# Altium PCB PC110-itx.PcbDoc (part 13 of 16)
Units mm, origin at the board's own origin, x right, y up, seen from the top; angles counter-clockwise.
Board outline 170 x 170 mm, 16 copper layers (FC1, FC2, FC3, FC4, IP1, IC1, IC2, IP2, IP3, IC3, IC4, IP4, BC4, BC3, BC2, BC1), stack 3.903 mm thick; 935 components, 1357 nets, 4698 pads, 3240 vias.
Unrouted connection lines stored in the file: 552.
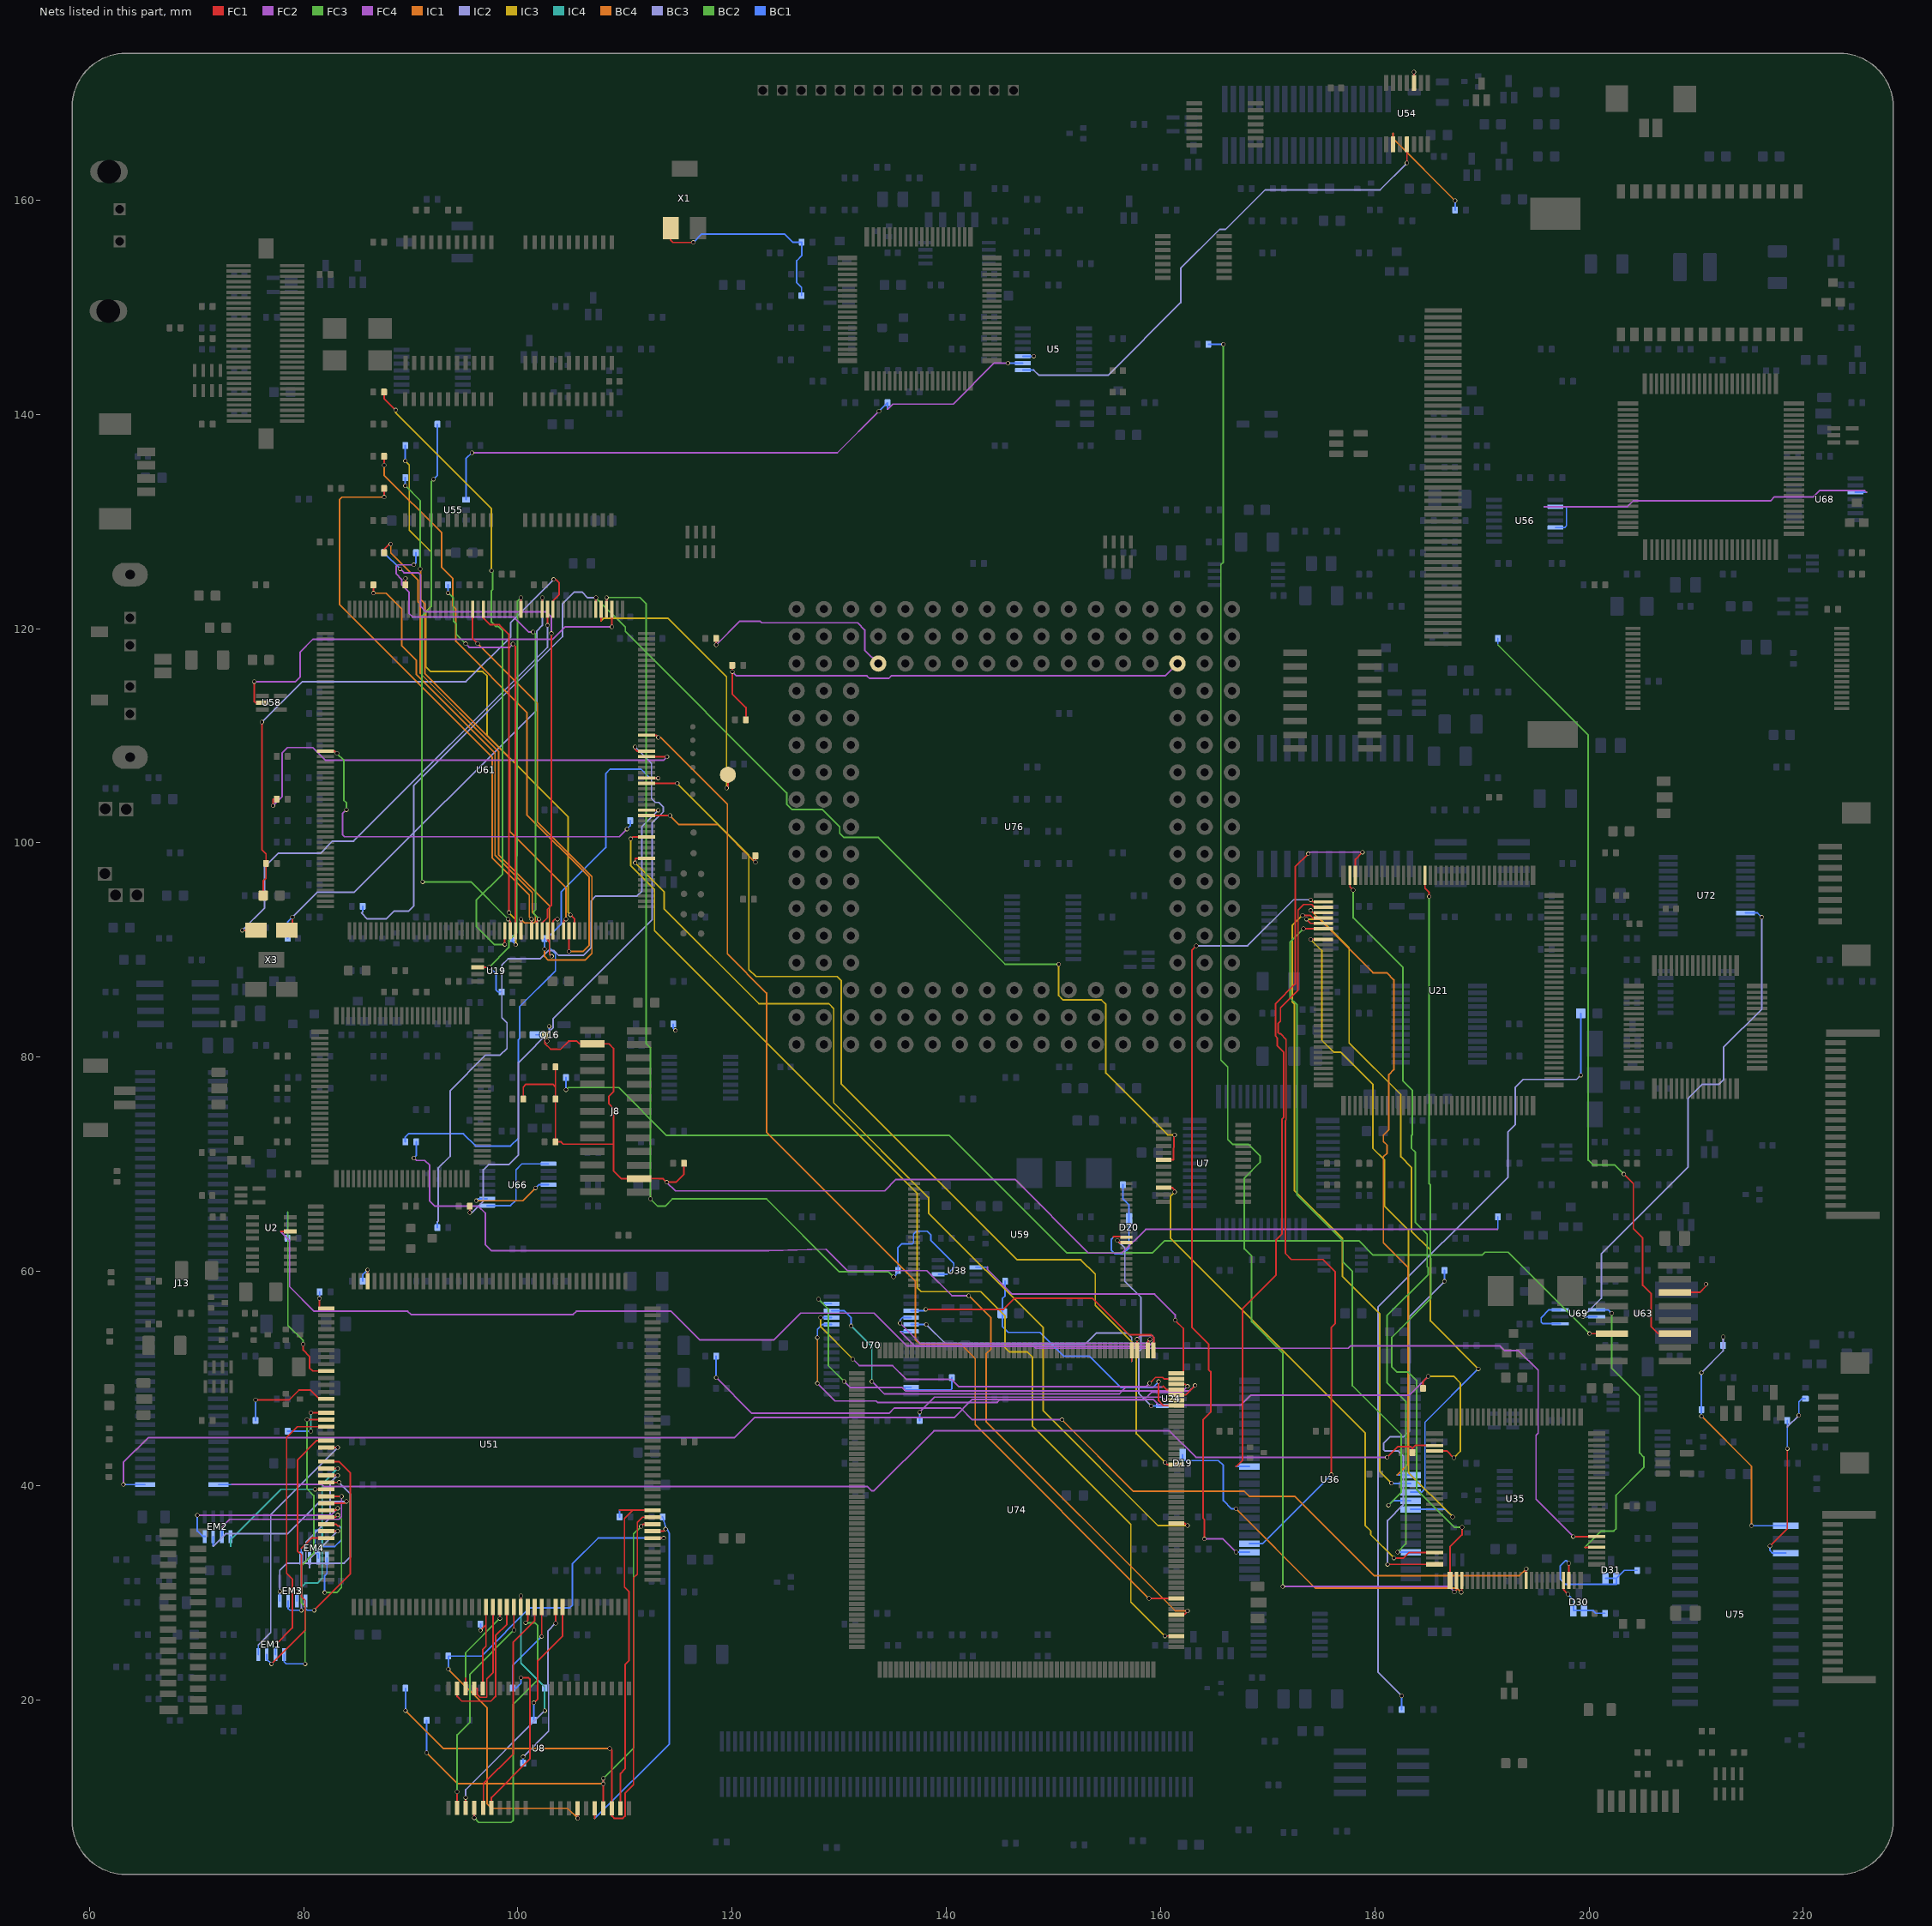
[diagram p26: the nets of this part, all layers, seen from the top]

## Via types
v1: diameter 0.4, hole 0.3, FC1 to BC1, 3240 vias

## Nets (pads, with @x,y where several pads share a name; then routed paths per layer and width w, separated by ;. In a path a pad name is that pad's centre, name@x,y a point inside that pad or via, vN(x,y) a via of type N, cw(c..) or ccw(c..) an arc to the next point about the centre after c; other vN are vias at no path point) (continued)
Net-(U51-IO11): R18.1 U8.34 U51.127 | length 53.2
  FC1 w0.15: v1(105.581,8.941) U8.34@105.581,9.871 ; U51.127@112.57,35.105 113.612,35.105 v1(113.614,35.103)
  IC1 w0.15: v1(93.51,22.86) 97.13,19.24 97.13,10.287 97.536,9.881 104.641,9.881 v1(105.581,8.941)
  BC1 w0.15: v1(93.51,22.86) R18.1@93.51,24.09 96.607,24.09 101.117,28.6 104.851,28.6 105.08,28.829 105.08,32.69 107.493,35.103 v1(113.614,35.103)
Net-(U51-IO12): R15.1 U8.36 U51.128 | length 33.5
  FC1 w0.15: 107.181,8.948 U8.36@107.181,9.871 ; U51.128@112.57,35.755 113.606,35.755 v1(113.792,35.941)
  BC1 w0.15: 107.181,8.948 107.188,8.941 114.148,15.9 114.148,35.535 113.89,35.996 v1(113.792,35.941) 113.792,36.172 R15.1@113.51,37.09
Net-(U51-IO13): R22.2 U8.37 U51.129 | length 49.7
  FC1 w0.15: v1(107.975,12.167) v1@107.981,12.161 ; U8.37@107.981,9.871 v1@107.981,12.161 ; v1(107.981,12.675) 107.981,12.167 v1@107.981,12.161 ; v1(111.506,36.195) 111.716,36.405 U51.129@112.57,36.405
  FC3 w0.15: v1(107.981,12.675) 110.795,15.488 110.795,35.484 v1(111.506,36.195)
  BC4 w0.15: v1(91.49,15.062) 94.386,12.167 v1(107.975,12.167)
  BC1 w0.15: v1(91.49,15.062) R22.2@91.49,18.09
Net-(U51-IO14): R233.1 U8.38 U51.130 | length 59.9
  FC1 w0.15: v1(108.578,15.469) 108.781,15.265 U8.38@108.781,9.871 108.781,9.144 108.984,8.941 109.804,8.941 110.007,9.144 110.007,11.278 110.795,12.065 110.795,31.394 111.15,31.75 111.15,36.576 111.629,37.055 U51.130@112.57,37.055
  BC4 w0.15: v1(89.51,18.999) 93.041,15.469 v1(108.578,15.469)
  BC1 w0.15: v1(89.51,18.999) R233.1@89.51,21.09
Net-(U51-IO15): R19.2 U8.39 U51.131 | length 32.4
  FC1 w0.15: 109.501,37.705 110.73,37.705 ; U8.39@109.581,9.871 109.581,13.137 110.007,13.564 110.007,23.292 110.388,23.673 110.388,30.099 109.952,30.536 109.952,36.927 110.73,37.705 ; U51.131@112.57,37.705 110.73,37.705
  BC1 w0.15: R19.2@109.49,37.09 109.49,37.694 109.501,37.705
Net-(U51-LP): R17.1 U51.54 | length 9.3
  FC1 w0.15: v1(75.51,48.006) 78.638,48.006 79.553,48.92 80.645,48.92 81.46,48.105 U51.54@82.13,48.105
  BC1 w0.15: R17.1@75.51,46.09 v1(75.51,48.006)
Net-(U51-OEL#): R263.1 U51.38 | length 2.3
  FC1 w0.15: U51.38@85.975,59.1 v1(85.975,60.147)
  BC1 w0.15: R263.1@85.51,59.09 85.51,59.682 v1(85.975,60.147)
Net-(U51-P0): EM1.5 U51.57 | length 28.2
  FC1 w0.15: v1(80.315,46.155) U51.57@82.13,46.155
  FC3 w0.15: v1(80.137,23.368) 80.137,28.727 79.807,29.058 79.807,32.537 80.95,33.68 80.95,39.065 80.315,39.7 v1(80.315,46.155)
  BC1 w0.15: EM1.5@78.175,24.24 78.175,23.571 78.378,23.368 v1(80.137,23.368)
Net-(U51-P1): EM1.6 U51.58 | length 25.3
  FC1 w0.15: v1(77.375,25.146) 78.943,26.714 78.943,31.285 78.41,31.819 78.41,44.501 79.414,45.505 U51.58@82.13,45.505
  BC1 w0.15: EM1.6@77.375,24.24 v1(77.375,25.146)
Net-(U51-P2): EM1.7 U51.60 | length 25.1
  FC1 w0.15: v1(77.007,23.368) 80.137,26.498 80.137,29.286 79.807,29.616 79.807,33.528 79.426,33.909 79.426,42.398 81.232,44.205 U51.60@82.13,44.205
  BC1 w0.15: EM1.7@76.55,24.24 76.55,23.825 v1(77.007,23.368)
Net-(U51-P3): EM1.8 U51.61 | length 23.4
  FC1 w0.15: U51.61@82.13,43.555 v1(83.185,43.555)
  BC3 w0.15: 75.775,25.121 75.768,25.127 76.932,26.292 76.932,37.302 v1(83.185,43.555)
  BC1 w0.15: EM1.8@75.775,24.24 75.775,25.121
Net-(U51-P4): EM3.5 U51.63 | length 18.5
  FC1 w0.15: v1(80.975,28.372) 84.353,31.749 84.353,41.214 83.312,42.255 U51.63@82.13,42.255
  BC1 w0.15: EM3.5@80.175,29.24 80.175,28.55 80.353,28.372 v1(80.975,28.372)
Net-(U51-P5): EM3.6 U51.64 | length 15.7
  FC1 w0.15: U51.64@82.13,41.605 v1(83.185,41.605)
  IC4 w0.15: v1(79.375,30.124) 80.162,30.912 81.28,30.912 81.737,31.369 81.737,40.157 v1(83.185,41.605)
  BC1 w0.15: EM3.6@79.375,29.24 v1(79.375,30.124)
Net-(U51-P6): EM3.7 U51.65 | length 17.1
  FC1 w0.15: U51.65@82.13,40.955 83.17,40.955 v1(83.185,40.97)
  BC3 w0.15: v1(79.781,28.372) 79.781,32.563 80.213,32.995 80.213,34.722 82.474,36.982 82.474,40.259 v1(83.185,40.97)
  BC1 w0.15: EM3.7@78.55,29.24 78.55,28.55 78.728,28.372 v1(79.781,28.372)
Net-(U51-P7): EM3.8 U51.66 | length 18.5
  FC1 w0.15: U51.66@82.13,40.305 v1(83.312,40.305)
  IC2 w0.15: v1(77.775,30.124) 77.775,32.106 78.435,32.766 83.795,32.766 84.353,33.325 84.353,39.264 v1(83.312,40.305)
  BC1 w0.15: EM3.8@77.775,29.24 v1(77.775,30.124)
Net-(U51-P8): EM2.5 U51.67 | length 12.4
  FC1 w0.15: v1(81.077,39.655) U51.67@82.13,39.655
  IC4 w0.15: 73.175,34.343 73.177,34.341 73.177,34.925 77.907,39.655 v1(81.077,39.655)
  BC1 w0.15: 73.175,34.343 EM2.5@73.175,35.24
Net-(U51-P9): EM2.6 U51.68 | length 15.8
  FC1 w0.15: U51.68@82.13,39.005 v1(83.541,39.005)
  FC2 w0.15: 72.375,36.108 72.365,36.119 73.101,36.855 83.312,36.855 83.541,37.084 v1(83.541,39.005)
  BC1 w0.15: EM2.6@72.375,35.24 72.375,36.108
Net-(U51-P10): EM2.7 U51.69 | length 17
  FC1 w0.15: U51.69@82.13,38.355 83.821,38.355 v1(83.998,38.532)
  IC2 w0.15: 71.55,34.343 71.552,34.341 72.72,35.509 78.511,35.509 81.534,38.532 v1(83.998,38.532)
  BC1 w0.15: 71.55,34.343 EM2.7@71.55,35.24
Net-(U51-P11): EM2.8 U51.70 | length 16.9
  FC1 w0.15: U51.70@82.13,37.705 83.007,37.705 83.185,37.883 v1(83.185,37.897)
  FC2 w0.15: v1(70.079,37.236) 82.525,37.236 v1(83.185,37.897)
  BC1 w0.15: v1(70.079,37.236) 70.079,35.763 70.561,35.281 70.775,35.281 EM2.8@70.775,35.24
Net-(U51-P12): EM4.5 U51.71 | length 13.1
  FC1 w0.15: U51.71@82.13,37.055 82.978,37.055 v1(83.185,37.262)
  FC3 w0.15: v1(81.966,30.023) 83.083,30.023 83.541,30.48 83.541,36.906 v1(83.185,37.262)
  BC1 w0.15: v1(81.966,30.023) 81.966,31.592 82.175,31.801 EM4.5@82.175,33.24
Net-(U51-P13): EM4.6 U51.72 | length 9.7
  FC1 w0.15: U51.72@82.13,36.405 83.026,36.405 83.185,36.246 83.312,36.246
  BC1 w0.15: EM4.6@81.375,33.24 81.375,33.655 81.178,33.655 81.026,33.807 81.026,35.845 81.712,35.845 81.712,34.442 81.839,34.315 82.906,34.315 83.541,34.95 83.541,36.017 83.312,36.246
Net-(U51-P14): EM4.7 U51.73 | length 6.4
  FC1 w0.15: U51.73@82.13,35.755 83.177,35.755 v1(83.185,35.763)
  BC3 w0.15: 80.55,32.366 80.543,32.36 80.543,33.122 v1(83.185,35.763)
  BC1 w0.15: 80.55,32.366 EM4.7@80.55,33.24
Net-(U51-P15): EM4.8 U51.74 | length 3.6
  FC1 w0.15: 79.775,34.131 80.749,35.105 U51.74@82.13,35.105
  BC1 w0.15: EM4.8@79.775,33.24 79.775,34.131
Net-(U51-RASA#): R21.2 U51.110 | length 15.9
  FC1 w0.15: v1(103.525,27.153) U51.110@103.525,28.66
  BC3 w0.15: v1(100.49,14.689) 102.87,17.069 102.87,21.412 102.819,21.463 102.819,26.447 v1(103.525,27.153)
  BC1 w0.15: R21.2@100.49,14.09 v1(100.49,14.689)
Net-(U51-RSET): R66.2 U51.41 | length 2.2
  FC1 w0.15: v1(81.483,57.48) 81.483,56.555 U51.41@82.13,56.555
  BC1 w0.15: v1(81.483,57.48) 81.49,57.487 R66.2@81.49,58.09
Net-(U51-SA0): R265.1 U8.16 U51.100 | length 9
  FC1 w0.15: v1(96.51,26.492) 97.025,27.007 ; U8.16@96.731,21.071 96.731,24.714 97.025,25.008 97.025,27.007 ; U51.100@97.025,28.66 97.025,27.007
  BC1 w0.15: v1(96.51,26.492) R265.1@96.51,27.09
Net-(U51-SA1): U8.17 U51.101 | length 10.5
  FC1 w0.15: U8.17@95.931,21.071 96.19,21.071 96.19,20.523 96.469,20.244 97.104,20.244 97.104,21.971 97.675,22.542 U51.101@97.675,28.66
Net-(U51-SA2): U8.18 U51.102 | length 8.9
  FC1 w0.15: U8.18@95.131,21.071 95.131,22.014 ; v1(98.323,27.61) 98.325,27.611 U51.102@98.325,28.66
  FC3 w0.15: 95.131,22.014 95.123,22.022 95.123,24.409 v1(98.323,27.61)
Net-(U51-SA3): U8.19 U51.103 | length 13.5
  FC1 w0.15: U8.19@94.331,21.071 94.331,20.32 94.763,19.888 97.485,19.888 97.917,20.32 97.917,25.993 98.975,27.051 U51.103@98.975,28.66
Net-(U51-SA4): U8.22 U51.104 | length 20.9
  FC1 w0.15: U8.22@94.331,9.921 v1(94.331,11.43) ; U51.104@99.625,28.66 99.625,26.537 v1(99.644,26.518)
  FC3 w0.15: v1(94.331,11.43) 94.331,16.739 95.529,17.937 95.529,22.403 v1(99.644,26.518)
Net-(U51-SA5): R270.1 U8.23 U51.105 | length 26.9
  FC1 w0.15: U8.23@95.131,9.921 v1(95.131,10.871) ; U51.105@100.275,28.66 100.275,29.714 v1(100.279,29.718)
  IC4 w0.15: v1(100.279,29.718) 100.279,23.444 102.51,21.213 v1(102.51,18.999)
  BC3 w0.15: v1(95.131,10.871) 95.131,11.62 v1(102.51,18.999)
  BC1 w0.15: v1(102.51,18.999) R270.1@102.51,21.09
Net-(U51-SA6): U8.24 U51.106 | length 26.7
  FC1 w0.15: v1(95.931,8.992) U8.24@95.931,9.921 ; v1(100.722,27.203) 100.925,27.407 U51.106@100.925,28.66
  FC3 w0.15: v1(95.931,8.992) 96.363,8.56 99.365,8.56 99.568,8.763 99.568,19.609 101.854,21.895 101.854,26.949 101.6,27.203 v1(100.722,27.203)
Net-(U51-SA7): U8.25 U51.107 | length 20.7
  FC1 w0.15: U8.25@96.781,9.921 96.781,12.192 99.568,14.979 99.568,25.4 101.575,27.407 U51.107@101.575,28.66
Net-(U51-SA8): R279.1 U8.26 U51.108 | length 24.6
  FC1 w0.15: U8.26@97.531,9.921 97.531,10.892 101.117,14.478 101.117,21.946 100.99,22.073 v1(100.279,22.073) ; v1(102.225,25.923) U51.108@102.225,28.66
  BC1 w0.15: v1(100.279,22.073) 100.279,21.539 99.83,21.09 R279.1@99.51,21.09 99.51,23.208 v1(102.225,25.923)
Net-(U51-SHFCLK): R20.1 U51.56 | length 5.3
  FC1 w0.15: v1(80.67,46.805) U51.56@82.13,46.805
  IC4 w0.15: v1(80.67,45.09) v1(80.67,46.805)
  BC1 w0.15: R20.1@78.51,45.09 v1(80.67,45.09)
Net-(U51-VSYNC): R46.2 U51.50 | length 19.6
  FC1 w0.15: v1(79.959,53.213) 79.959,52.654 80.543,52.07 80.543,51.003 80.842,50.705 U51.50@82.13,50.705
  FC3 w0.15: 78.49,65.515 78.537,65.561 78.537,54.953 79.959,53.531 v1(79.959,53.213)
  BC1 w0.15: R46.2@78.49,63.09 78.49,65.515
Net-(U51-WEA#): R16.2 U51.111 | length 11.7
  FC1 w0.15: v1(101.49,19.736) 101.854,20.1 101.854,23.663 104.175,25.984 U51.111@104.175,28.66
  BC1 w0.15: R16.2@101.49,18.09 v1(101.49,19.736)
Net-(U54A-C): U5.10 U54.3 | length 2
  FC1 w0.15: U54.3@183.65,170.953 v1(183.65,171.97)
  BC1 w0.15: U5.10@147.137,145.44 v1(148.155,145.44)
Net-(U54B-C): U5.8 U54.11 | length 47.9
  FC1 w0.15: v1(183,163.474) U54.11@183,165.228
  IC2 w0.15: 148.153,144.14 148.158,144.145 148.641,143.662 155.092,143.662 161.874,150.444 161.874,153.645 165.506,157.277 166.065,157.277 169.748,160.96 180.485,160.96 v1(183,163.474)
  BC1 w0.15: U5.8@147.137,144.14 148.153,144.14
Net-(U54B-Q): R286.2 U54.9 | length 10.6
  FC1 w0.15: U54.9@181.7,165.228 181.7,166.231
  IC1 w0.15: 181.7,166.231 181.712,166.243 181.712,165.737 v1(187.49,159.959)
  BC1 w0.15: R286.2@187.49,159.09 v1(187.49,159.959)
Net-(U55-OUT): R278.1 U5.9 U55.1 | length 60.4
  FC4 w0.15: v1(95.707,136.423) 129.826,136.423 v1(133.706,140.303) ; 134.51,140.496 134.518,140.487 135.001,140.97 140.64,140.97 144.46,144.79 v1(145.745,144.79)
  BC1 w0.15: U55.1@95.16,132.04 95.16,135.876 v1(95.707,136.423) ; v1(133.706,140.303) 134.493,141.09 R278.1@134.51,141.09 134.51,140.496 ; v1(145.745,144.79) U5.9@147.137,144.79
Net-(U56-Pad2): U56.2 U56.5 U68.3 | length 36.6
  FC2 w0.15: 195.838,131.39 195.834,131.394 203.581,131.394 204.114,131.928 216.941,131.928 217.322,132.309 220.929,132.309 221.513,132.893 225.73,132.893 225.882,132.74
  BC1 w0.15: 195.838,131.39 U56.2@196.862,131.39 197.769,131.39 197.891,131.267 197.891,129.618 197.714,129.44 U56.5@196.862,129.44 ; U68.3@224.862,132.74 225.882,132.74
Net-(U59-RP#): D20.3 R113.2 U59.10 | length 10.7
  FC1 w0.15: 155.6,63.195 155.6,63.245 156.311,63.245 156.311,63.19 U59.10@156.8,63.19
  BC1 w0.15: 155.6,63.195 155.412,63.007 155.412,61.961 155.741,61.632 156.475,61.632 157.05,62.206 D20.3@157.05,64.89 157.05,66.192 156.49,66.752 R113.2@156.49,68.09
Net-(U59-WE#): U24.4 U59.9 | length 18.9
  FC1 w0.15: v1(155.956,62.89) 156.156,62.69 U59.9@156.8,62.69
  BC3 w0.15: v1(155.956,62.89) 156.667,62.179 156.667,59.08 158.166,57.582 158.166,52.705 157.963,52.502 157.963,48.608 v1(159.131,47.44)
  BC1 w0.15: v1(159.131,47.44) U24.4@160.15,47.44
Net-(U61-CPUCLK33): R251.2 U61.127 | length 37.1
  FC1 w0.15: U61.127@82.028,108.557 82.908,108.557 v1(83.109,108.356)
  FC2 w0.15: v1(83.998,103.099) 83.622,102.723 83.622,100.777 83.815,100.584 109.474,100.584 v1(110.185,101.295)
  FC3 w0.15: v1(83.109,108.356) 83.77,107.695 83.77,103.962 83.998,103.734 v1(83.998,103.099)
  BC1 w0.15: v1(110.185,101.295) 110.49,101.6 R251.2@110.49,102.09
Net-(U61-IOR#): R326.1 U61.29 | length 44.9
  FC1 w0.15: v1(77.14,103.48) 77.14,104.09 R326.1@77.49,104.09 ; U61.29@112.028,108.057 113.71,108.057 113.716,108.052 v1(113.919,108.052)
  FC4 w0.15: v1(77.14,103.48) 77.978,104.318 77.978,108.382 78.499,108.903 80.86,108.903 82.042,107.721 113.589,107.721 v1(113.919,108.052)
Net-(U61-IOW#): R318.2 U61.30 | length 55.4
  FC1 w0.15: v1(95.51,65.493) R318.2@95.51,66.09 ; v1(110.947,108.966) 110.947,108.76 111.15,108.557 U61.30@112.028,108.557
  BC3 w0.15: v1(95.51,65.493) 95.719,65.493 96.774,66.549 96.774,69.494 97.257,69.977 99.162,69.977 100.048,70.864 100.048,79.5 103.276,82.728 103.276,83.566 112.522,92.812 112.522,101.854 113.589,102.921 113.589,103.327 113.139,103.777 112.851,103.777 112.471,104.158 112.471,107.442 v1(110.947,108.966)
Net-(U61-MEMR#): R322.2 U61.18 | length 12.6
  FC1 w0.15: U61.18@112.028,102.557 v1(114.198,102.557) ; v1(122.174,98.196) R322.2@122.174,98.806
  BC4 w0.15: v1(114.198,102.557) 115.047,101.709 118.662,101.709 v1(122.174,98.196)
Net-(U61-MEMW#): R324.2 U61.19 | length 56.3
  FC1 w0.15: U61.19@112.028,103.057 v1(113.106,103.057)
  BC3 w0.15: 92.49,64.626 92.558,64.694 92.558,69.621 93.675,70.739 93.675,76.86 97.003,80.188 98.349,80.188 98.984,80.823 98.984,83.21 98.501,83.693 98.501,88.595 99.085,89.179 102.083,89.179 102.845,89.941 103.378,89.941 103.81,89.51 106.121,89.51 106.832,90.221 106.832,94.59 107.29,95.047 111.125,95.047 111.582,95.504 111.582,101.533 v1(113.106,103.057)
  BC1 w0.15: R324.2@92.49,64.09 92.49,64.626
Net-(U61-PS{slash}RCLR#): C79.1 R116.1 U61.66 | length 53.4
  FC1 w0.15: v1(76.098,111.277) 76.098,99.365 76.49,98.973 R116.1@76.49,98.09 76.49,96.709 76.225,96.444 C79.1@76.225,95.09 ; U61.66@103.278,121.807 103.278,122.607 103.861,123.19 103.861,124.282 103.543,124.6 v1(103.34,124.6)
  IC2 w0.15: v1(76.098,111.277) 79.883,115.062 95.157,115.062 99.336,119.241 99.336,120.596 v1(103.34,124.6)
Net-(U61-PWRGD): R96.2 U19.2 U61.72 | length 40.8
  FC1 w0.15: U19.2@96.25,88.39 v1(97.317,88.39) ; U61.72@100.278,121.807 v1(100.279,122.885) v1(100.279,122.885)
  FC3 w0.15: v1@97.333,88.39 v1(97.317,88.39) 99.162,90.235 99.162,90.881 99.898,91.617 99.973,120.216 99.973,122.579 v1(100.279,122.885)
  BC1 w0.15: v1@97.333,88.39 97.968,87.755 97.968,86.258 98.136,86.09 R96.2@98.49,86.09
Net-(U61-PWRGD_P13): R49.1 U7.6 U61.58 | length 129.9
  FC1 w0.15: U61.58@107.278,121.807 v1@107.278,122.874 ; U7.6@160.288,70.415 161.214,70.415 161.262,72.692 v1(161.315,72.746)
  IC2 w0.15: 85.51,93.56 85.408,93.458 85.954,92.913 87.706,92.913 88.443,93.65 89.814,93.65 90.272,94.107 90.272,105.359 104.165,119.253 104.165,122.301 105.283,123.419 105.994,123.419 106.528,122.885 v1(107.29,122.885)
  IC3 w0.15: v1(150.495,88.671) 150.495,85.75 150.901,85.344 154.483,85.344 154.889,84.938 154.889,78.511 160.655,72.746 v1(161.315,72.746)
  BC2 w0.15: v1@107.278,122.874 v1(107.29,122.885) 110.033,120.142 110.033,119.736 125.095,104.673 125.095,103.607 125.578,103.124 128.422,103.124 130.048,101.498 130.048,100.914 130.454,100.508 133.655,100.508 145.491,88.671 v1(150.495,88.671)
  BC1 w0.15: 85.51,93.56 R49.1@85.51,94.09
Net-(U61-RAMA0): R346.2 U61.199 | length 55.1
  FC1 w0.15: v1(104.902,93.294) 105.278,92.918 U61.199@105.278,91.807
  IC3 w0.15: v1(89.49,135.656) 89.865,135.28 89.865,129.21 91.923,127.152 91.923,122.098 91.415,121.59 91.415,116.434 91.846,116.002 96.723,116.002 97.13,115.595 97.13,110.007 104.699,102.438 104.699,93.497 v1(104.902,93.294)
  BC1 w0.15: v1(89.49,135.656) R346.2@89.49,137.09
Net-(U61-RAMA1): R338.2 U61.198 | length 57.6
  FC1 w0.15: v1(87.51,135.267) R338.2@87.51,136.09 ; v1(104.778,89.865) U61.198@104.778,91.807
  IC1 w0.15: v1(87.51,135.267) 87.51,134.334 92.888,128.956 92.888,125.73 93.928,124.69 93.928,122.099 94.209,121.818 94.209,118.821 100.838,112.192 100.838,102.616 106.655,96.799 106.655,90.449 106.07,89.865 v1(104.778,89.865)
Net-(U61-RAMA2): R342.2 U61.197 | length 48.6
  FC1 w0.15: U61.197@104.278,91.807 104.278,92.685 v1(104.481,92.888)
  FC3 w0.15: v1(89.49,133.344) 90.881,131.953 v1(90.881,125.578)
  IC1 w0.15: v1(90.881,125.578) 90.907,125.551 90.907,122.757 91.313,122.352 91.313,115.824 99.238,107.899 99.238,101.092 104.481,95.849 v1(104.481,92.888)
  BC1 w0.15: v1(89.49,133.344) R342.2@89.49,134.09
Net-(U61-RAMA3): R337.2 U61.195 | length 2
  FC1 w0.15: R337.2@89.51,124.09 v1(89.51,124.69) ; U61.195@103.278,91.807 103.278,92.684 103.481,92.887 v1(103.684,92.887)
Net-(U61-RAMA4): R334.2 U61.194 | length 48.4
  FC1 w0.15: R334.2@87.51,127.09 87.51,127.413 87.986,127.889 v1(88.138,127.889) ; U61.194@102.778,91.807 102.778,90.894 102.952,90.72 102.952,89.625 v1(103.155,89.422)
  IC1 w0.15: v1(88.138,127.889) 88.138,127.076 90.677,124.537 90.677,122.504 90.881,122.3 90.881,115.851 98.196,108.536 98.196,98.882 102.952,94.127 102.952,89.625 v1(103.155,89.422)
Net-(U61-RAMA5): R333.2 U61.193 | length 49.5
  FC1 w0.15: U61.193@102.278,91.807 102.278,92.533 102.768,93.022 102.768,93.802 103.124,94.158 v1(103.124,119.558)
  FC2 w0.15: v1(89.002,125.591) 89.37,125.223 90.691,125.223 90.932,124.982 90.932,122.072 91.44,121.564 102.667,121.564 103.124,121.107 v1(103.124,119.558)
  BC1 w0.15: R333.2@87.49,127.09 87.503,127.09 v1(89.002,125.591)
Net-(U61-RAMA6): R343.2 U61.192 | length 48.4
  FC1 w0.15: U61.192@101.778,91.807 101.778,92.684 v1(101.981,92.888)
  FC2 w0.15: v1(90.287,125.959) 88.798,125.959 88.646,125.806 88.646,125.12 89.154,124.612 89.154,124.104 89.836,123.422 89.836,121.441 90.17,121.107 99.593,121.107 101.016,119.685 v1(101.422,119.685)
  FC3 w0.15: v1(101.422,119.685) 101.651,119.456 101.651,93.777 101.498,93.624 101.498,93.37 v1(101.981,92.888)
  BC1 w0.15: v1(90.287,125.959) 90.49,126.162 R343.2@90.49,127.09
Net-(U61-RAMA7): R352.2 U61.191 | length 52.7
  FC1 w0.15: v1(87.51,132.283) R352.2@87.51,133.09 ; v1(101.27,92.888) 101.278,92.88 U61.191@101.278,91.807
  IC1 w0.15: v1(87.51,132.283) 83.566,132.283 83.363,132.08 83.363,122.25 97.612,108.001 97.612,98.591 101.067,95.137 101.067,93.091 v1(101.27,92.888)
Net-(U61-RAMA8): R347.2 U61.189 | length 41
  FC1 w0.15: v1(86.51,123.319) R347.2@86.51,124.09 ; U61.189@100.278,91.807 100.278,92.885 v1(100.279,92.887)
  IC1 w0.15: v1(86.51,123.319) 87.704,123.319 89.154,121.869 89.154,118.415 90.526,117.043 90.526,115.722 97.866,108.382 97.866,98.857 101.346,95.377 101.346,93.522 101.625,93.243 101.625,92.659 101.498,92.533 100.633,92.533 v1(100.279,92.887)
Net-(U61-RAMA9): R329.2 U61.188 | length 37.7
  FC1 w0.15: v1(99.543,118.567) 99.778,118.332 U61.188@99.778,91.807
  FC2 w0.15: v1(95.123,118.593) 95.453,118.262 99.238,118.262 v1(99.543,118.567)
  FC3 w0.15: v1(93.49,123.35) 93.98,122.86 93.98,120.726 94.259,120.447 94.259,119.456 v1(95.123,118.593)
  BC1 w0.15: v1(93.49,123.35) R329.2@93.49,124.09
Net-(U61-RAMA10): R345.2 U61.187 | length 53.9
  FC1 w0.15: v1(99.085,92.888) 99.278,92.695 U61.187@99.278,91.807
  FC3 w0.15: v1(91.11,96.368) 91.049,96.429 91.049,121.199 91.923,122.072 91.923,133.756 v1(92.126,133.96)
  BC2 w0.15: v1(91.11,96.368) 95.606,96.368 v1(99.085,92.888)
  BC1 w0.15: v1(92.126,133.96) 92.49,134.324 R345.2@92.49,139.09
Net-(U61-RAMA11): R335.2 U61.186 | length 60.4
  FC1 w0.15: R335.2@87.51,142.09 87.51,141.496 v1(88.595,140.411) ; v1(98.778,90.526) U61.186@98.778,91.807
  FC3 w0.15: v1(97.536,125.425) 97.66,125.301 97.66,123.669 97.536,123.545 97.536,120.625 97.959,120.202 98.17,120.202 98.577,119.795 98.577,97.104 96.114,94.64 96.114,92.202 97.79,90.526 v1(98.778,90.526)
  IC3 w0.15: v1(88.595,140.411) 88.595,140.157 97.536,131.216 v1(97.536,125.425)
Net-(U61-RESET): U58.2 U61.55 | length 41.2
  FC1 w0.15: v1(75.387,115.062) 75.387,113.192 75.489,113.09 U58.2@76.15,113.09 ; U61.55@108.778,121.807 108.778,120.178 v1(108.788,120.167)
  FC2 w0.15: v1(75.387,115.062) 79.248,115.062 79.68,115.494 79.68,117.831 80.874,119.024 103.251,119.024 104.394,120.167 v1(108.788,120.167)
Net-(U61-RTCOSCI): C251.2 U61.68 X3.1 | length 46.5
  FC1 w0.15: X3.1@78.45,91.84 78.943,91.84 v1(78.943,93.066) ; U61.68@102.278,121.807 102.278,122.877 v1(102.286,122.885)
  BC3 w0.15: v1(78.943,93.066) 81.283,95.405 84.737,95.405 101.777,112.445 101.777,119.786 102.286,120.294 v1(102.286,122.885)
  BC1 w0.15: C251.2@78.52,91.09 78.52,92.642 v1(78.943,93.066)
Net-(U61-RTCOSCO): C250.2 U61.67 X3.4 | length 47.9
  FC1 w0.15: v1@74.276,91.84 X3.4@75.55,91.84 ; v1(102.768,120.32) 102.778,120.329 U61.67@102.778,121.807
  IC2 w0.15: v1@74.276,91.84 v1(74.27,91.846) 76.36,93.936 76.36,97.772 77.622,99.035 81.578,99.035 82.712,100.168 84.674,100.168 102.768,118.262 v1(102.768,120.32)
  BC1 w0.15: v1(74.27,91.846) 74.513,92.09 C250.2@75.52,92.09
Net-(U61-TP1): J14.1 U61.57 | length 26.8
  FC1 w0.15: 107.778,120.732 U61.57@107.778,121.807 ; v1(119.482,105.131) 119.609,105.258 J14.1@119.609,106.362
  IC3 w0.15: 107.778,120.732 108.026,120.98 113.995,120.98 119.482,115.494 v1(119.482,105.131)
Net-(U61-UNKNOWN3): R246.2 U61.81 | length 43.2
  FC1 w0.15: U61.81@95.778,121.807 95.778,119.081 v1(96.241,118.618)
  IC1 w0.15: v1(96.241,118.618) 101.829,113.03 101.829,101.956 106.909,96.876 106.909,89.687 106.288,89.067 102.819,89.067 102.49,89.396 v1(102.49,90.093)
  BC1 w0.15: v1(102.49,90.093) R246.2@102.49,91.09
Net-(U61-UNKNOWN4): R249.2 U61.79 | length 33.8
  FC1 w0.15: U61.79@96.778,121.807 96.778,121.003 97.411,120.371 98.273,120.371 99.162,119.482 v1(99.162,93.497)
  IC3 w0.15: v1(99.162,93.497) 99.797,92.862 v1(99.797,90.5)
  BC1 w0.15: R249.2@99.49,91.09 99.49,90.807 v1(99.797,90.5)
Net-(U63-3XCPUCLK): R359.1 U63.14 | length 4
  FC1 w0.15: U63.14@208,58.04 210.332,58.04 210.903,58.611 v1(210.903,58.814)
  BC1 w0.15: R359.1@114.51,83.09 114.51,82.693 v1(114.713,82.49)
Net-(U63-14.318MHz): R357.2 U63.11 | length 73.8
  FC1 w0.15: v1(203.251,69.088) 204.14,68.199 204.14,63.983 205.003,63.119 205.003,58.699 205.802,57.901 205.802,54.839 206.451,54.19 U63.11@208,54.19
  FC3 w0.15: 191.49,118.492 199.923,110.058 199.923,70.383 200.355,69.952 202.387,69.952 v1(203.251,69.088)
  BC1 w0.15: 191.49,118.492 R357.2@191.49,119.09
Net-(U63-24MHz): R358.2 U63.6 | length 109.6
  FC1 w0.15: v1(200.05,54.19) U63.6@202.15,54.19
  BC2 w0.15: v1(104.49,76.962) 104.693,77.165 109.424,77.165 113.894,72.695 140.284,72.695 151.256,61.723 159.233,61.723 160.376,62.865 178.511,62.865 179.851,61.525 190,61.525 190.272,61.798 192.443,61.798 v1(200.05,54.19)
  BC1 w0.15: v1(104.49,76.962) R358.2@104.49,78.09
Net-(U66-Pad1): U66.1 U66.8 | length 9
  BC1 w0.15: U66.8@97.138,66.14 99.312,66.14 99.822,66.65 99.822,69.494 100.368,70.04 U66.1@102.862,70.04
Net-(U66-Pad4): U66.4 U66.9 | length 8.5
  BC4 w0.15: v1(96.114,66.599) 100.457,66.599 v1(101.651,67.793)
  BC1 w0.15: v1(96.114,66.599) 96.305,66.79 U66.9@97.138,66.79 ; v1(101.651,67.793) 101.948,68.09 U66.4@102.862,68.09
Net-(U69-Pad5): U69.5 U69.7 | length 4.3
  BC1 w0.15: U69.5@197.3,55.115 195.682,55.115 195.529,55.267 195.529,55.677 196.267,56.415 U69.7@197.3,56.415
Net-(U70-A_VCC3#): U70.6 U74.4 | length 28.7
  FC1 w0.15: U74.4@157.808,52.619 v1(157.808,53.67)
  FC4 w0.15: 135.695,54.39 135.687,54.381 137.058,53.01 158.902,53.01 159.36,53.467 159.36,53.866 159.207,54.018 158.156,54.018 v1(157.808,53.67)
  BC1 w0.15: 135.695,54.39 U70.6@136.713,54.39
Net-(U70-A_VCC5#): U70.5 U74.5 | length 25.2
  FC1 w0.15: 157.302,51.593 157.308,51.593 U74.5@157.308,52.619
  BC3 w0.15: v1(138.125,55.04) 139.952,53.213 152.984,53.213 154.026,54.254 156.87,54.254 157.302,53.823 157.302,51.593
  BC1 w0.15: U70.5@136.713,55.04 v1(138.125,55.04)
Net-(U70-A_VPP_PGM): U70.3 U74.1 | length 25.9
  FC1 w0.15: v1(138.085,56.464) 145.352,56.464 146.393,57.506 153.619,57.506 157.05,54.075 159.132,54.075 159.359,53.848 159.359,53.359 159.308,53.308 U74.1@159.308,52.619
  BC1 w0.15: U70.3@136.713,56.34 137.961,56.34 v1(138.085,56.464)
Net-(U70-A_VPP_VCC): U70.4 U74.2 | length 26.8
  FC1 w0.15: U74.2@158.808,52.619 158.808,53.467 v1(159.004,53.663)
  FC4 w0.15: v1(135.687,55.169) 137.566,53.289 158.63,53.289 v1(159.004,53.663)
  BC1 w0.15: v1(135.687,55.169) 135.687,55.474 135.903,55.69 U70.4@136.713,55.69
Net-(U70-B_VCC3#): U70.26 U74.206 | length 43.6
  FC1 w0.15: U74.206@161.458,49.469 162.316,49.469 v1(162.509,49.276)
  IC1 w0.15: v1(127.965,49.555) v1(127.965,53.823)
  FC4 w0.15: v1(127.965,49.555) 129.616,47.905 133.451,47.905 133.579,47.777 144.754,47.777 144.983,48.006 158.445,48.006 159.156,48.717 161.95,48.717 v1(162.509,49.276)
  BC1 w0.15: v1(127.965,53.823) 127.965,54.583 128.422,55.04 U70.26@129.288,55.04
Net-(U70-B_VCC5#): U70.27 U74.207 | length 37.8
  FC1 w0.15: v1(158.979,49.563) 159.527,50.111 160.172,50.111 160.314,49.969 U74.207@161.458,49.969
  FC2 w0.15: v1(131.267,51.816) 131.877,51.206 134.982,51.206 136.257,49.932 140.467,49.932 141.148,49.251 158.667,49.251 v1(158.979,49.563)
  IC3 w0.15: v1(128.27,55.69) 128.27,54.813 v1(131.267,51.816)
  BC1 w0.15: v1(128.27,55.69) U70.27@129.288,55.69
Net-(U70-B_VPP_PGM): U70.29 U74.204 | length 45.5
  FC1 w0.15: U74.204@161.458,48.469 162.337,48.469 v1(163.22,49.352)
  FC2 w0.15: v1(130.454,49.733) 131.013,49.175 135.864,49.175 136.188,48.851 162.72,48.851 v1(163.22,49.352)
  FC3 w0.15: v1(128.067,57.404) 128.981,56.49 128.981,51.206 v1(130.454,49.733)
  BC1 w0.15: v1(128.067,57.404) 128.481,56.99 U70.29@129.288,56.99
Net-(U70-B_VPP_VCC): U70.28 U74.205 | length 38.2
  FC1 w0.15: 160.18,49.208 160.249,49.276 160.556,48.969 U74.205@161.458,48.969
  IC4 w0.15: v1(131.115,54.915) 133.045,52.984 v1(133.045,49.733)
  FC4 w0.15: v1(133.045,49.733) 134.214,48.565 156.159,48.565 156.802,49.208 160.18,49.208
  BC1 w0.15: U70.28@129.288,56.34 130.454,56.34 131.115,55.68 v1(131.115,54.915)
Net-(U70-SHDN#): R363.1 U70.14 | length 6.4
  BC1 w0.15: U70.14@136.713,49.19 136.102,49.19 136.102,48.932 140.415,48.932 140.51,49.027 R363.1@140.51,50.09
Net-(U72-A6): U69.3 U72.9 | length 48.1
  BC3 w0.15: v1(199.415,55.765) 201.143,57.492 201.143,61.646 209.245,69.748 209.245,76.148 210.567,77.47 212.141,77.47 212.547,77.876 212.547,80.924 216.129,84.506 v1(216.129,93.059)
  BC1 w0.15: v1(199.415,55.765) U69.3@200.7,55.765 ; U72.9@214.6,93.465 215.722,93.465 v1(216.129,93.059)
Net-(U74-CS#): U38.2 U74.208 | length 27.1
  FC1 w0.15: v1(161.366,55.448) 162.128,54.686 162.128,50.469 U74.208@161.458,50.469
  FC4 w0.15: 143.829,60.39 143.84,60.401 143.84,60.173 146.126,57.887 159.436,57.887 161.366,55.956 v1(161.366,55.448)
  BC1 w0.15: U38.2@142.75,60.39 143.829,60.39
Net-(U74-INTR#): R162.1 U74.203 | length 25.4
  FC1 w0.15: 160.438,47.969 U74.203@161.458,47.969
  FC2 w0.15: v1(137.51,46.863) 138.908,48.261 160.146,48.261 160.438,47.969
  BC1 w0.15: R162.1@137.51,46.09 v1(137.51,46.863)
Net-(U74-SYSCLK): R317.1 U74.163 | length 102.6
  FC1 w0.15: U74.163@161.458,27.969 162.233,27.969 162.509,28.245 v1(162.509,28.321)
  FC2 w0.15: v1(90.297,70.587) 90.526,70.358 91.313,70.358 91.77,69.901 91.77,66.573 92.253,66.091 96.317,66.091 96.952,65.456 96.952,62.509 97.536,61.925 123.444,61.925 128.753,62.078 130.759,60.071 138.176,60.071 140.513,57.734 v1(142.088,57.734)
  IC1 w0.15: v1(142.088,57.734) 144.17,55.651 144.17,52.756 143.713,52.299 143.713,45.975 161.367,28.321 v1(162.509,28.321)
  BC1 w0.15: v1(90.297,70.587) 90.51,70.8 R317.1@90.51,72.09
Net-(U75-INT): R199.2 R204.1 U75.15 | length 24.4
  IC1 w0.15: v1(210.49,46.49) 215.163,41.817 v1(215.163,36.26)
  BC3 w0.15: v1(210.49,50.546) 212.522,52.578 v1(212.522,53.899)
  BC1 w0.15: v1(210.49,46.49) R199.2@210.49,47.09 v1(210.49,50.546) ; R204.1@212.51,53.09 212.51,53.887 v1(212.522,53.899) ; v1(215.163,36.26) U75.15@218.38,36.26
Net-(U75-P1B0): R197.1 R202.2 U75.17 | length 17.9
  FC1 w0.15: v1(216.891,34.366) 218.51,35.986 v1(218.51,43.459)
  BC3 w0.15: 218.51,45.498 218.516,45.491 v1(219.583,46.558)
  BC1 w0.15: v1(216.891,34.366) 216.891,33.934 217.115,33.71 U75.17@218.38,33.71 ; v1(218.51,43.459) R197.1@218.51,46.09 ; v1(219.583,46.558) 219.583,47.841 219.862,48.12 R202.2@220.19,48.12
Net-(U76-A30): R395.2 U76.P3 | length 19.4
  FC1 w0.15: v1(118.51,118.491) R395.2@118.51,119.09
  FC2 w0.15: v1(118.51,118.491) 120.723,120.704 122.614,120.704 122.77,120.548 131.724,120.548 132.385,119.888 132.385,118.005 U76.P3@133.643,116.747
Net-(U76-CLK_CPU): R252.2 R253.1 U76.C3 | length 48
  FC1 w0.15: R253.1@120.013,116.586 v1(120.013,115.986) 120.013,113.919 121.287,112.645 R252.2@121.287,111.506
  FC2 w0.15: v1(120.013,115.986) 120.399,115.6 132.587,115.6 132.817,115.37 134.633,115.37 134.863,115.6 160.435,115.6 U76.C3@161.583,116.747
Net-(X1--): C27.1 R40.2 X1.2 | length 19.4
  FC1 w0.15: X1.2@114.27,157.391 114.27,156.261 114.473,156.058 v1(116.383,156.058)
  BC1 w0.15: v1(116.383,156.058) 117.17,156.845 124.899,156.845 125.654,156.09 R40.2@126.49,156.09 126.49,154.811 126.035,154.356 126.035,152.312 126.48,151.867 C27.1@126.48,151.09
OKI_CE#: U21.142 U36.14 | length 69.4
  FC1 w0.15: 167.063,41.79 167.665,42.393 167.665,50.825 ; 167.666,50.825 167.666,56.541 170.764,59.639 170.764,62.931 171.323,63.49 171.323,74.21 171.488,74.375 171.488,80.48 170.891,81.077 170.891,81.809 170.737,81.964 170.737,85.012 172.568,86.843 172.568,97.765 v1(173.787,98.984) ; U21.142@178.182,96.966 178.182,98.477 v1(178.841,99.136)
  FC2 w0.15: v1(173.787,98.984) 173.939,99.136 v1(178.841,99.136)
  BC1 w0.15: 167.063,41.79 U36.14@168.29,41.79
OKI_SA12: U21.9 U36.40 | length 65.2
  FC1 w0.15: v1(174.015,90.991) U21.9@175.209,90.991
  IC3 w0.15: v1(174.015,90.991) 175.057,89.95 175.057,81.585 176.162,80.479 176.793,80.479 179.807,77.466 179.807,71.501 180.924,70.383 180.924,66.082 183.134,63.872 183.134,41.224 v1(187.274,37.084)
  BC1 w0.15: U36.40@183.34,37.79 186.568,37.79 v1(187.274,37.084)
OKI_SA13: U21.7 U36.39 | length 63.2
  FC1 w0.15: v1(173.334,91.991) U21.7@175.209,91.991
  FC3 w0.15: v1(173.334,91.991) 172.086,90.743 172.086,85.55 172.72,84.916 172.72,67.158 177.038,62.84 177.038,60.858 177.902,59.995 177.902,49.327 182.465,44.763 182.465,39.361 v1(181.28,38.176)
  BC1 w0.15: v1(181.28,38.176) 181.694,38.59 U36.39@183.34,38.59
OKI_SA14: U21.6 U36.38 | length 65.9
  FC1 w0.15: v1(173.609,92.888) 174.006,92.491 U21.6@175.209,92.491
  IC3 w0.15: v1(173.609,92.888) 174.904,92.888 177.597,90.195 177.597,81.331 182.423,76.505 182.423,70.712 183.413,69.722 183.413,63.754 185.191,61.976 185.191,55.372 v1(189.662,50.902)
  BC1 w0.15: U36.38@183.34,39.39 184.348,39.39 184.684,39.726 184.684,45.924 v1(189.662,50.902)
OKI_SA15: U21.5 U36.37 | length 61.1
  FC1 w0.15: v1(173.253,93.243) 173.964,93.243 174.216,92.991 U21.5@175.209,92.991
  IC3 w0.15: v1(173.253,93.243) 172.289,92.279 172.289,85.167 172.48,84.975 172.48,67.575 176.987,63.068 176.987,59.512 180.447,56.052 180.447,41.346 v1(181.559,40.234)
  BC1 w0.15: v1(181.559,40.234) 181.719,40.234 181.762,40.19 U36.37@183.34,40.19
OKI_SA16: U21.4 U36.36 | length 61.2
  FC1 w0.15: v1(174.015,93.701) 174.218,93.498 U21.4@175.209,93.498
  IC1 w0.15: v1(174.015,93.701) 179.832,87.884 181.102,87.884 181.767,87.219 181.767,78.839 181.305,78.377 181.305,73.228 180.797,72.72 180.797,72.135 181.152,71.78 181.152,71.057 180.797,70.702 180.797,62.662 183.083,60.376 183.083,41.975 182.098,40.99
  BC1 w0.15: 182.098,40.99 U36.36@183.34,40.99
OKI_SA17: U21.3 U36.5 | length 70.7
  FC1 w0.15: U21.3@175.209,93.991 174.37,93.991 174.103,94.259 173.354,94.259 172.834,93.738 172.834,87.986 172.821,87.973 172.821,86.232 171.196,84.607 171.196,83.364 170.967,83.134 170.967,82.296 171.069,82.194 171.176,82.194 171.718,81.651 171.718,74.145 171.653,74.08 171.653,61.671 172.212,61.112 175.158,61.112 176.301,59.969 176.301,55.145 175.946,54.789 v1(175.946,41.021)
  BC1 w0.15: U36.5@168.29,34.59 169.515,34.59 v1(175.946,41.021)
OKI_SA18: U21.2 U36.4 | length 75.1
  FC1 w0.15: v1(163.322,90.399) 162.941,90.018 162.941,54.762 164.475,53.229 164.475,50.845 164.678,50.642 164.678,46.873 163.956,46.151 163.956,36.972 164.085,36.843 v1(164.085,35.027) ; v1(174.015,94.691) 174.216,94.491 U21.2@175.209,94.491
  FC2 w0.15: v1(164.085,35.027) 165.819,35.027 v1(167.056,33.79)
  IC2 w0.15: v1(163.322,90.399) 168.123,90.399 172.415,94.691 v1(174.015,94.691)
  BC1 w0.15: v1(167.056,33.79) U36.4@168.29,33.79
OKI_SA19: U21.143 U36.45 | length 70.2
  FC1 w0.15: U21.143@177.682,96.966 177.682,95.91 v1(177.987,95.606)
  FC3 w0.15: v1(177.987,95.606) 177.987,93.006 182.624,88.369 182.624,77.777 183.49,76.911 183.49,72.746 183.413,72.669 183.413,71.501 183.769,71.145 183.769,64.592 184.887,63.475 184.887,60.452 184.988,60.351 184.988,59.715 181.127,55.855 181.127,49.632 182.898,47.861 182.898,34.562 v1(182.126,33.79)
  BC1 w0.15: v1(182.126,33.79) U36.45@183.365,33.79
PCMCIA_BALE: U61.33 U74.166 | length 105.4
  FC1 w0.15: U61.33@112.028,110.057 112.904,110.057 v1(113.107,109.854) ; v1(158.923,29.469) U74.166@161.458,29.469
  IC1 w0.15: v1(113.107,109.854) 113.311,109.854 119.558,103.606 119.558,89.636 123.215,85.979 123.215,73 137.109,59.106 137.109,53.645 137.516,53.238 141.326,53.238 142.697,51.867 142.697,45.695 v1(158.923,29.469)
PCMCIA_CLK: R317.2 U61.25 | length 56.3
  FC1 w0.15: U61.25@112.028,106.057 v1(113.106,106.057)
  BC1 w0.15: R317.2@89.49,72.09 89.49,72.542 89.795,72.847 94.91,72.847 96.049,71.709 99.318,71.709 100.048,72.438 100.048,81.633 100.152,81.737 100.152,84.709 103.51,88.067 103.51,89.657 102.946,90.221 102.946,91.338 104.039,92.432 104.039,95.403 108.204,99.568 108.204,106.477 108.61,106.883 111.506,106.883 112.332,106.057 v1(113.106,106.057)
PCMCIA_CS: R160.2 U38.6 U61.56 | length 99.9
  FC1 w0.15: U61.56@108.278,121.807 v1(108.278,122.911)
  FC3 w0.15: v1(108.278,122.911) 111.404,122.911 111.989,122.326 111.989,81.255 112.37,80.874 v1(112.37,66.777)
  BC2 w0.15: v1(112.37,66.777) 113.055,66.091 113.741,66.091 114.426,66.777 123.215,66.777 130.023,59.969 134.595,59.969 v1(135.077,59.487)
  BC1 w0.15: v1(135.077,59.487) 135.49,59.9 R160.2@135.49,60.09 135.49,60.979 135.458,61.011 135.458,62.179 135.865,62.586 136.83,62.586 136.931,62.687 136.931,63.475 137.211,63.754 138.226,63.754 138.566,63.414 138.566,62.882 140.69,60.757 140.69,60.35 140.08,59.74 U38.6@139.25,59.74
PCMCIA_KB_sound: C25.2 R35.1 | length 76.7
  BC3 w0.15: v1(182.51,20.385) 180.289,22.607 180.289,56.667 192.43,68.809 192.43,73.027 193.097,73.693 193.097,77.171 193.853,77.927 198.831,77.927 v1(199.225,78.321)
  BC1 w0.15: R35.1@182.51,19.09 v1(182.51,20.385) ; v1(199.225,78.321) C25.2@199.225,84.09
PCMCIA_REFRESH: U61.10 U74.180 | length 91.3
  FC1 w0.15: v1(110.947,98.146) 110.952,98.557 U61.10@112.028,98.557 ; U74.180@161.458,36.469 162.311,36.469 v1(162.509,36.271)
  IC3 w0.15: v1(110.947,98.146) 113.664,95.428 113.664,93.828 122.504,84.988 129.032,84.988 129.489,84.531 129.489,75.743 138.345,66.887 138.345,65.439 149.047,54.737 149.047,46.99 159.766,36.271 v1(162.509,36.271)
PCMCIA_SBHE#: U61.14 U74.159 | length 101.9
  FC1 w0.15: v1(110.541,100.381) 110.717,100.557 U61.14@112.028,100.557 ; v1(160.401,25.969) U74.159@161.458,25.969
  IC3 w0.15: v1(110.541,100.381) 110.541,97.866 112.751,95.656 112.751,91.821 137.262,67.31 137.262,58.522 137.668,58.115 143.205,58.115 145.466,55.855 145.466,52.908 145.898,52.476 147.574,52.476 148.031,52.019 148.031,45.578 157.226,36.383 157.226,29.144 v1(160.401,25.969)
PCMCIA_Sound: C207.2 R120.2 U74.202 | length 25.1
  FC1 w0.15: v1(159.817,49.708) 159.817,47.93 160.278,47.469 U74.202@161.458,47.469
  BC1 w0.15: R120.2@145.49,59.09 145.49,57.72 145.225,57.455 C207.2@145.225,56.09 145.225,54.864 145.784,54.305 148.742,54.305 150.952,52.095 153.34,52.095 156.286,49.149 159.258,49.149 v1(159.817,49.708)
PCMCIA_ZEROWS#: U61.24 U74.191 | length 94.2
  FC1 w0.15: U61.24@112.028,105.557 v1(114.884,105.557) ; v1(160.426,42.164) 160.621,41.969 U74.191@161.458,41.969
  IC3 w0.15: v1(114.884,105.557) 121.564,98.877 121.564,88.189 122.225,87.528 129.819,87.528 130.175,87.173 130.175,77.521 146.609,61.087 152.554,61.087 153.898,59.743 153.898,56.821 157.733,52.985 157.733,44.857 v1(160.426,42.164)
Pluto_50: R276.1 U35.50 | length 37
  FC1 w0.15: v1(181.194,32.65) U35.50@185.57,32.65
  BC3 w0.15: v1(181.194,32.65) 181.194,36.744 182.651,38.201 182.651,42.783 182.196,43.238 180.95,43.238 180.81,43.378 180.81,43.93 181.458,44.577 182.702,44.577 183.236,45.11 183.236,55.806 v1(186.51,59.08)
  BC1 w0.15: v1(186.51,59.08) R276.1@186.51,60.09
Pluto_51: U21.129 U35.51 | length 71.8
  FC1 w0.15: U21.129@184.682,96.966 184.682,95.785 185.073,95.394 v1(185.073,94.987) ; U35.51@187.02,31.15 187.02,34.291 188.138,35.409 v1(188.138,36.119)
  FC3 w0.15: v1(185.073,94.987) 185.073,68.19 185.191,68.072 185.191,61.238 185.218,61.212 185.218,57.481 181.585,53.848 181.585,51.079 182.067,50.597 183.134,50.597 183.896,49.835 183.896,39.642 187.419,36.119 v1(188.138,36.119)
Pluto_52: R85.1 U35.52 | length 139.3
  FC1 w0.15: v1(187.427,30.074) 187.62,30.267 U35.52@187.62,31.15
  FC2 w0.15: v1(171.399,30.582) 186.919,30.582 v1(187.427,30.074)
  FC3 w0.15: v1(165.862,146.558) 165.862,126.213 165.633,125.984 165.633,79.731 166.268,79.096 166.268,72.339 166.751,71.857 168.224,71.857 169.29,70.79 169.29,70.18 167.818,68.708 167.818,62.104 168.504,61.418 168.504,55.296 171.399,52.4 v1(171.399,30.582)
  BC1 w0.15: R85.1@164.467,146.558 v1(165.862,146.558)
Pluto_72: D30.1 D30.2 R156.2 U35.72 | length 6.2
  FC1 w0.15: U35.72@197.62,31.15 197.62,30.277 v1(198.026,29.87)
  BC1 w0.15: v1(198.026,29.87) 198.55,29.347 D30.1@198.55,28.34 D30.2@199.55,28.34 200.381,28.34 200.631,28.09 R156.2@201.49,28.09
Pluto_73: D31.1 D31.2 R152.2 U35.73 | length 13.2
  FC1 w0.15: U35.73@198.12,31.15 v1(198.12,32.764)
  BC1 w0.15: v1(198.12,32.764) 197.899,32.985 197.778,32.985 197.305,32.512 197.305,31.293 197.813,30.785 202.55,30.785 D31.2@202.55,31.34 ; D31.1@201.55,31.34 D31.2@202.55,31.34 ; R152.2@204.49,32.09 203.3,32.09 D31.2@202.55,31.34
Pluto_BIOS_WR_EN: D19.3 U35.53 | length 34.7
  FC1 w0.15: v1(188.062,30.048) 188.12,30.107 U35.53@188.12,31.15
  BC4 w0.15: v1(167.056,37.829) 174.455,30.429 187.681,30.429 v1(188.062,30.048)
  BC1 w0.15: D19.3@162.05,42.89 162.05,42.342 165.405,42.342 165.862,41.885 165.862,38.608 166.641,37.829 v1(167.056,37.829)
Pluto_CLK: R348.1 U35.65 | length 87
  FC1 w0.15: U35.65@194.12,31.15 194.12,32.22 v1(194.132,32.233)
  FC4 w0.15: v1(118.51,50.095) 121.848,46.757 134.641,46.757 135.128,47.244 141.326,47.244 142.418,46.152 v1(150.8,46.152)
  BC4 w0.15: v1(150.8,46.152) 157.474,39.478 167.812,39.478 168.3,38.989 172.542,38.989 179.934,31.598 193.497,31.598 v1(194.132,32.233)
  BC1 w0.15: v1(118.51,50.095) R348.1@118.51,52.09
Pluto_Dock_IO1: J13.2 R139.2 U35.28 | length 118.1
  FC1 w0.15: v1(181.153,42.647) 182.138,43.632 183.363,43.632 183.51,43.485 ; R139.2@183.51,43.09 183.51,43.485 ; U35.28@185.57,43.75 183.775,43.75 183.51,43.485
  FC2 w0.15: 73.3,40.102 73.304,40.107 81.712,40.107 81.89,39.929 132.619,39.929 133.025,39.522 133.248,39.522 138.836,45.11 160.833,45.11 163.297,42.647 v1(181.153,42.647)
  BC1 w0.15: J13.2@72.058,40.102 73.3,40.102
Pluto_Dock_IO2: J13.99 R130.2 U35.29 | length 143.6
  FC1 w0.15: R130.2@184.51,49.09 184.51,49.738 v1(184.988,50.216) ; U35.29@185.57,43.25 186.722,43.25 v1(187.376,42.596)
  FC2 w0.15: v1(63.17,40.102) 63.17,42.164 65.481,44.475 120.218,44.475 122.098,46.355 140.716,46.355 142.392,48.031 159.335,48.031 159.834,47.532 167.496,47.532 168.396,48.432 183.204,48.432 v1(184.988,50.216)
  IC3 w0.15: v1(184.988,50.216) 187.35,50.216 187.985,49.581 187.985,43.205 v1(187.376,42.596)
  BC1 w0.15: v1(63.17,40.102) J13.99@65.207,40.102
Pluto_EN_IRDA: U7.10 U35.48 | length 48.3
  FC1 w0.15: U7.10@160.288,67.815 161.115,67.815 161.315,67.615 v1(161.315,67.412) ; v1(181.788,33.249) 182.677,33.249 183.178,33.75 U35.48@185.57,33.75
  IC3 w0.15: v1(161.315,67.412) 160.934,67.031 160.934,63.094 179.095,44.933 179.095,36.303 179.619,35.779 179.619,35.417 v1(181.788,33.249)
Pluto_ESS_AEN: U35.79 U69.2 | length 28.7
  FC1 w0.15: 199.629,34.25 U35.79@200.72,34.25
  FC3 w0.15: 199.629,34.25 201.143,35.763 202.311,35.763 202.514,35.966 202.514,39.116 205.105,41.707 205.105,42.672 204.724,43.053 204.724,48.362 202.108,50.978 v1(202.108,56.083)
  BC1 w0.15: U69.2@200.7,56.415 201.776,56.415 v1(202.108,56.083)
Pluto_IRDA_OUT: U2.6 U35.81 | length 147.9
  FC1 w0.15: 77.862,63.74 U2.6@78.75,63.74 ; v1(198.526,35.25) U35.81@200.72,35.25
  FC2 w0.15: 77.862,63.74 77.851,63.729 78.689,62.89 78.689,58.572 80.975,56.286 89.713,56.286 90.017,55.982 105.156,55.982 105.461,56.286 114.3,56.286 116.992,53.594 123.901,53.594 126.416,56.109 133.248,56.109 136.322,53.035 148.143,53.035 148.349,52.829 177.508,52.829 177.714,53.035 191.694,53.035 192.126,52.603 193.421,52.603 195.25,50.775 195.25,44.917 195.052,44.72 195.052,38.724 v1(198.526,35.25)
Pluto_Switched_PNET5: C86.1 J8.12 J8.15 Q16.3 R129.2 R187.2 R189.2 R190.2 R191.2 R194.2 | length 130.4
  FC1 w0.15: R191.2@100.51,76.09 100.51,77.216 100.764,77.47 103.256,77.47 103.51,77.216 ; C86.1@102.52,82.09 102.52,81.703 ; v1(102.723,81.5) 102.52,81.703 ; R194.2@103.51,79.09 103.51,77.216 ; R190.2@115.51,70.09 115.51,69.088 114.748,68.326 v1(113.894,68.326) 113.57,68.65 J8.15@111.3,68.65 109.677,68.65 108.931,69.395 108.931,71.866 ; 102.52,81.703 102.52,81.28 103.053,80.747 103.988,80.747 104.736,81.495 105.495,81.495 105.74,81.25 J8.12@106.95,81.25 108.509,81.25 108.931,80.828 108.931,76.777 108.506,76.352 108.506,75.642 108.931,75.216 108.931,71.866 ; 103.51,77.216 R189.2@103.51,76.09 R187.2@103.51,72.09 104.038,72.09 104.246,71.882 108.915,71.882 108.931,71.866
  FC2 w0.15: v1(113.894,68.326) 114.706,67.513 134.239,67.513 135.306,68.58 146.406,68.58 153.276,61.71 156.389,61.71 158.61,63.932 191.414,63.932
  BC1 w0.15: Q16.3@101.69,82.09 102.664,82.09 102.915,82.341 v1(102.915,82.88) ; 191.414,63.932 191.49,64.008 R129.2@191.49,65.09